# EAGLE board StencilA (EAGLE 5.11)

Size 302.39 x 104.52 mm. Coordinates in mm from the lower left corner, seen from the top.
Outline: 302.39,5.08 302.39,5.33
Outline: 302.39,5.33 302.39,45.97 arc90 297.31,51.05 292.23,51.05 arc180 292.23,0.25 297.31,0.25 arc90 302.39,5.33
Outline: 78.87,0.25 arc-180 78.87,51.05 83.95,51.05 arc-90 89.03,45.97 89.03,5.08 arc-90 83.95,0.25 78.87,0.25
Outline: circle at 25.53,25.65 radius 25.53
Outline: circle at 132.46,25.4 radius 25.4
Outline: circle at 185.34,25.65 radius 25.53
Outline: circle at 238.89,26.16 radius 25.4
Outline: circle at 25.53,78.99 radius 25.53
Outline: circle at 132.46,78.74 radius 25.4
Copper layers (1*16): Top 0.035mm / dielectric 1.5mm / Bottom 0.035mm
Design rules "default": minimum track width 10mil, minimum drill 24mil, track to track 8mil, track to pad 8mil, pad to pad 8mil, via to via 8mil, smd to smd 8mil, copper to edge 40mil, drill to drill 8mil, minimum pad ring 10mil, minimum via ring 8mil, stop-mask expansion 4mil, vias tented up to drill 0mil, thermal gap 10mil

## Footprints (pad centres in the part's own frame; a part is rotated, then mirrored left to right if it is on the bottom)
C0402 = smd 0.7 x 0.9: 1 -0.65,0; 2 0.65,0
C0805 = smd 1.3 x 1.5: 1 -0.95,0; 2 0.95,0
C0603 = smd 1.1 x 1: 1 -0.85,0; 2 0.85,0
EIA6032 = smd 1.5 x 2.4: P$1 -2.3,0; P$2 2.3,0
SOD123FL = smd 0.91 x 1.22: A 1.625,0; C -1.625,0
SOD80C = smd 1.4 x 1.8: A 1.7,0; C -1.7,0
JST-2-SMD = smd 1 x 4.6: 1 -1,-3.7; 2 1,-3.7 | smd 1.6 x 3.4: NC1 -3.4,1.5; NC2 3.4,1.5
1210 = smd 1.2 x 2: 1 -1.6,0; 2 1.6,0
LED-0603 = smd 0.8 x 0.8: A 0,-0.75; C 0,0.75
CRYSTAL-SMD-5X3 = smd 1.9 x 1.1: 1 -1.85,-1.15; 2 1.85,-1.15; 3 1.85,1.15; 4 -1.85,1.15
CM415 = smd 1.1 x 1.9: P$1 0,0; P$2 3.3,0
R0402 = smd 0.7 x 0.9: 1 -0.65,0; 2 0.65,0
0402-RES = smd 0.7 x 0.9: 1 -0.65,0; 2 0.65,0
R1206 = smd 1.6 x 1.803: 1 -1.422,0; 2 1.422,0
SJ_3_PASTE2&3 = smd 0.635 x 1.27: 1 -0.813,0; 2 0,0; 3 0.813,0
SJ_2S-NO = smd 0.635 x 1.27: 1 -0.45,0; 2 0.45,0
QFN20 = smd 1 x 1: 0 0,0 | smd 0.65 x 0.3: 1 -1.9,1; 2 -1.9,0.5; 3 -1.9,0; 4 -1.9,-0.5; 5 -1.9,-1; 11 1.9,-1; 12 1.9,-0.5; 13 1.9,0; 14 1.9,0.5; 15 1.9,1 | smd 0.3 x 0.65: 6 -1,-1.9; 7 -0.5,-1.9; 8 0,-1.9; 9 0.5,-1.9; 10 1,-1.9; 16 1,1.9; 17 0.5,1.9; 18 0,1.9; 19 -0.5,1.9; 20 -1,1.9
ANTENNA-CHIP5 = smd 1.016 x 2.54: FEED -3.302,0; NC 3.302,0
S-PQFP64-G64 = smd 1.2 x 0.3: 1 -5.7,3.75; 2 -5.7,3.25; 3 -5.7,2.75; 4 -5.7,2.25; 5 -5.7,1.75; 6 -5.7,1.25; 7 -5.7,0.75; 8 -5.7,0.25; 9 -5.7,-0.25; 10 -5.7,-0.75; 11 -5.7,-1.25; 12 -5.7,-1.75; 13 -5.7,-2.25; 14 -5.7,-2.75; 15 -5.7,-3.25; 16 -5.7,-3.75; 33 5.7,-3.75; 34 5.7,-3.25; 35 5.7,-2.75; 36 5.7,-2.25; 37 5.7,-1.75; 38 5.7,-1.25; 39 5.7,-0.75; 40 5.7,-0.25; 41 5.7,0.25; 42 5.7,0.75; 43 5.7,1.25; 44 5.7,1.75; 45 5.7,2.25; 46 5.7,2.75; 47 5.7,3.25; 48 5.7,3.75 | smd 0.3 x 1.2: 17 -3.75,-5.7; 18 -3.25,-5.7; 19 -2.75,-5.7; 20 -2.25,-5.7; 21 -1.75,-5.7; 22 -1.25,-5.7; 23 -0.75,-5.7; 24 -0.25,-5.7; 25 0.25,-5.7; 26 0.75,-5.7; 27 1.25,-5.7; 28 1.75,-5.7; 29 2.25,-5.7; 30 2.75,-5.7; 31 3.25,-5.7; 32 3.75,-5.7; 49 3.75,5.7; 50 3.25,5.7; 51 2.75,5.7; 52 2.25,5.7; 53 1.75,5.7; 54 1.25,5.7; 55 0.75,5.7; 56 0.25,5.7; 57 -0.25,5.7; 58 -0.75,5.7; 59 -1.25,5.7; 60 -1.75,5.7; 61 -2.25,5.7; 62 -2.75,5.7; 63 -3.25,5.7; 64 -3.75,5.7
DUBLIB_SOT23 = smd 1 x 1.4: 1 -0.95,-1.1; 2 0.95,-1.1; 3 0,1.1
CCM03-300X = smd 1.5 x 1.3: C1 24.7,5.1; C2 24.7,2.5; C3 24.7,0; C5 0,5.08; C6 0,2.54; C7 0,0; P1 0,-2.54; P2 24.705,-2.54
SOT23-5L = smd 0.55 x 1.2: 1 -0.95,-1.3; 2 0,-1.3; 3 0.95,-1.3; 4 0.95,1.3; 5 -0.95,1.3
QFN-20-5X5 = smd 0.55 x 0.4: P1 0,-0.975; P2 0,-1.625; P3 0,-2.275; P4 0,-2.925; P5 0,-3.575; P11 4.55,-3.575; P12 4.55,-2.925; P13 4.55,-2.275; P14 4.55,-1.625; P15 4.55,-0.975 | smd 0.4 x 0.55: P6 0.975,-4.55; P7 1.625,-4.55; P8 2.275,-4.55; P9 2.925,-4.55; P10 3.575,-4.55; P16 3.575,0; P17 2.925,0; P18 2.275,0; P19 1.625,0; P20 0.975,0
SOIC8@1 = smd 0.5 x 2.2: 1 -1.905,-3.154; 2 -0.645,-3.154; 3 0.625,-3.154; 4 1.895,-3.154; 5 1.905,3.154; 6 0.635,3.154; 7 -0.635,3.154; 8 -1.905,3.154
TSSOP8 = smd 1.2 x 0.35: 1 -2.925,0.975; 2 -2.925,0.325; 3 -2.925,-0.325; 4 -2.925,-0.975; 5 2.925,-0.975; 6 2.925,-0.325; 7 2.925,0.325; 8 2.925,0.975
TSSOP20 = smd 0.305 x 0.991: 1 -2.925,-2.918; 2 -2.275,-2.918; 3 -1.625,-2.918; 4 -0.975,-2.918; 5 -0.325,-2.918; 6 0.325,-2.918; 7 0.975,-2.918; 8 1.625,-2.918; 9 2.275,-2.918; 10 2.925,-2.918; 11 2.925,2.918; 12 2.275,2.918; 13 1.625,2.918; 14 0.975,2.918; 15 0.325,2.918; 16 -0.325,2.918; 17 -0.975,2.918; 18 -1.625,2.918; 19 -2.275,2.918; 20 -2.925,2.918
SO-14 = smd 0.6 x 2.2: 1 -3.81,-2.6; 2 -2.54,-2.6; 3 -1.27,-2.6; 4 0,-2.6; 5 1.27,-2.6; 6 2.54,-2.6; 7 3.81,-2.6; 8 3.81,2.6; 9 2.54,2.6; 10 1.27,2.6; 11 0,2.6; 12 -1.27,2.6; 13 -2.54,2.6; 14 -3.81,2.6
SC70-6L = smd 0.35 x 0.8: 1 -0.65,-0.85; 2 0,-0.85; 3 0.65,-0.85; 4 0.65,0.85; 5 0,0.85; 6 -0.65,0.85
LGA8 = smd 1 x 0.7: P1 -1,3.75; P2 -1,2.5; P3 -1,1.25; P4 -1,0; P5 1,0; P6 1,1.25; P7 1,2.5; P8 1,3.75
STM32-JTAG-10P = smd 0.762 x 2.032: 1 0,0; 2 0,3.81; 3 1.27,0; 4 1.27,3.81; 5 2.54,0; 6 2.54,3.81; 7 3.81,0; 8 3.81,3.81; 9 5.08,0; 10 5.08,3.81
SOT23 = smd 1 x 1.4: 1 -0.95,-1.1; 2 0.95,-1.1; 3 0,1.1
SWITCH-CK-KMT0 = smd 0.7 x 0.7: P1 -1.45,-0.95; P2 1.45,-0.95; P3 1.45,0.95; P4 -1.45,0.95
DFN-2X3 = smd 0.7 x 0.3: 1 -1.325,0.75; 2 -1.325,0.25; 3 -1.325,-0.25; 4 -1.325,-0.75; 5 1.325,-0.75; 6 1.325,-0.25; 7 1.325,0.25; 8 1.325,0.75 | smd 1.5 x 1.3: EXP 0,0
HTSSOP20PWP = smd 0.61 x 2.1: 1 -3.095,-2.45; 10 3.095,-2.45; 11 3.095,2.45; 20 -3.095,2.45 | smd 0.27 x 1.2: 2 -2.275,-2.9; 3 -1.625,-2.9; 4 -0.975,-2.9; 5 -0.325,-2.9; 6 0.325,-2.9; 7 0.975,-2.9; 8 1.625,-2.9; 9 2.275,-2.9; 12 2.275,2.9; 13 1.625,2.9; 14 0.975,2.9; 15 0.325,2.9; 16 -0.325,2.9; 17 -0.975,2.9; 18 -1.625,2.9; 19 -2.275,2.9 | smd 6.8 x 3: EXP 0,0
SOIC8 = smd 0.5 x 2.2: 1 -1.905,-3.154; 2 -0.645,-3.154; 3 0.625,-3.154; 4 1.895,-3.154; 5 1.905,3.154; 6 0.635,3.154; 7 -0.635,3.154; 8 -1.905,3.154
SOT23-6L = smd 0.55 x 1.2: 1 -0.95,-1.3; 2 0,-1.3; 3 0.95,-1.3; 4 0.95,1.3; 5 0,1.3; 6 -0.95,1.3
U.FL = smd 2.2 x 0.85: P$1 0,1.375; P$2 0,-1.375 | smd 1.05 x 1: P$3 1.525,0; P$4 -1.525,0
PW_R-PDSO-G14 = smd 0.4 x 1.2: 1 -1.95,-2.9; 2 -1.3,-2.9; 3 -0.65,-2.9; 4 0,-2.9; 5 0.65,-2.9; 6 1.3,-2.9; 7 1.95,-2.9; 8 1.95,2.9; 9 1.3,2.9; 10 0.65,2.9; 11 0,2.9; 12 -0.65,2.9; 13 -1.3,2.9; 14 -1.95,2.9
TELIT-GE865 = smd 1 x 1: A1 0,0; A2 0,-2.4; A3 0,-4.8; A4 0,-7.2; A5 0,-9.6; A6 0,-12; A7 0,-14.4; A8 0,-16.8; B1 2.4,0; B2 2.4,-2.4; B3 2.4,-4.8; B4 2.4,-7.2; B5 2.4,-9.6; B6 2.4,-12; B7 2.4,-14.4; B8 2.4,-16.8; C1 4.8,0; C2 4.8,-2.4; C3 4.8,-4.8; C4 4.8,-7.2; C5 4.8,-9.6; C6 4.8,-12; C7 4.8,-14.4; C8 4.8,-16.8; D1 7.2,0; D2 7.2,-2.4; D3 7.2,-4.8; D4 7.2,-7.2; D5 7.2,-9.6; D6 7.2,-12; D7 7.2,-14.4; D8 7.2,-16.8; E1 9.6,0; E2 9.6,-2.4; E3 9.6,-4.8; E4 9.6,-7.2; E5 9.6,-9.6; E6 9.6,-12; E7 9.6,-14.4; E8 9.6,-16.8; F1 12,0; F2 12,-2.4; F3 12,-4.8; F4 12,-7.2; F5 12,-9.6; F6 12,-12; F7 12,-14.4; F8 12,-16.8; G1 14.4,0; G2 14.4,-2.4; G3 14.4,-4.8; G4 14.4,-7.2; G5 14.4,-9.6; G6 14.4,-12; G7 14.4,-14.4; G8 14.4,-16.8; H1 16.8,0; H2 16.8,-2.4; H3 16.8,-4.8; H5 16.8,-9.6; H6 16.8,-12; H7 16.8,-14.4; H8 16.8,-16.8
HIH-5030 = smd 2.54 x 2.54: P$1 0,0 | smd 0.508 x 1.778: P$2 -1.27,-11.43; P$3 0,-11.43; P$4 1.27,-11.43
UX60A-MB-5ST = smd 2 x 0.5: 1 2.25,1.6; 2 2.25,0.8; 3 2.25,0; 4 2.25,-0.8; 5 2.25,-1.6 | smd 2.2 x 2.5: M1 -3.3,-4.2; M2 -3.3,4.2; M3 2,4.2; M4 2,-4.2

## Placement (x,y rotation side)
C1  1.5pF  [C0402]  41.4,25.65 180 top
C2  1.0pF  [C0402]  41.4,24.38 180 top
C3  0.0022uF  [C0402]  40.13,23.11 0 top
C4  4.7pF  [C0402]  40.13,21.84 0 top
C5  12.5pF  [C0402]  35.71,16.76 0 top
C6  12.5pF  [C0402]  40.77,19.94 270 top
C7  0.033uF  [C0402]  33.32,29.39 180 top
C8  12.5pF  [C0402]  11,26.47 90 top
C9  12.5pF  [C0402]  11,24.05 270 top
C10  18pF  [C0402]  11.35,32 180 top
C11  18pF  [C0402]  8.79,32 0 top
C12  220pF  [C0402]  14.81,32 0 top
C13  0.1uF  [C0402]  26.54,28.4 0 top
C14  0.1uF  [C0402]  14.81,29.51 180 top
C15  0.1uF  [C0402]  24,15.75 270 top
C16  0.1uF  [C0402]  11.4,19.84 180 top
C17  0.1uF  [C0402]  80.14,42.42 90 top
C18  10uF  [C0805]  22.1,8.56 270 top
C19  0.1uF  [C0402]  82.17,36.32 270 top
C20  10uF  [C0805]  32.84,15.44 90 top
C21  18pF  [C0402]  17.22,42.04 90 top
C22  18pF  [C0402]  17.22,39.7 270 top
C23  0.1uF  [C0402]  28.88,36.32 0 top
C24  0.47uF  [C0402]  30,45.01 0 top
C25  0.1uF  [C0402]  31.42,36.32 180 top
C26  0.1uF  [C0402]  39.83,33.73 180 top
C27  2.2uF  [C0603]  61.59,17.53 270 top
C28  2.2uF  [C0603]  73.28,16.51 270 top
C29  10uf  [C0805]  73.28,12.45 180 top
C30  10uF  [C0805]  73.28,10.41 180 top
C31  33pF  [C0402]  136.27,7.62 270 top
C32  33pF  [C0402]  132.46,14.73 180 top
C33  33pF  [C0402]  133.73,7.62 270 top
C34  33pF  [C0402]  135,7.62 270 top
C35  100uF  [EIA6032]  129.92,17.78 0 top
C36  1uF  [C0402]  129.92,14.73 0 top
C37  0.1uF  [C0402]  250.82,39.37 0 top
C38  0.1uF  [C0402]  230.25,47.75 180 top
C39  0.1uF  [C0402]  233.81,17.27 0 top
C40  0.1uF  [C0402]  233.81,26.16 0 top
C41  0.1uF  [C0402]  233.81,35.05 0 top
C42  0.1uF  [C0402]  235.08,43.94 0 top
C43  0.1uF  [C0402]  250.82,35.31 0 top
C44  10uF  [C0805]  245.24,8.38 270 top
C45  0.1uF  [C0402]  297.05,44.7 0 top
C46  0.1uF  [C0402]  282.07,35.81 270 top
C47  1uF  [C0402]  284.86,26.67 270 top
C48  1uF  [C0402]  286.13,26.67 270 top
C49  33pF  [C0402]  294,14.99 180 top
C50  33pF  [C0402]  294,19.56 180 top
C51  12.5pF  [C0402]  11,79.81 90 top
C52  12.5pF  [C0402]  11,77.39 270 top
C53  18pF  [C0402]  11.35,85.34 180 top
C54  18pF  [C0402]  8.79,85.34 0 top
C55  220pF  [C0402]  14.81,85.34 0 top
C56  0.1uF  [C0402]  26.54,81.74 0 top
C57  0.1uF  [C0402]  14.81,82.85 180 top
C58  0.1uF  [C0402]  24,69.09 270 top
C59  0.1uF  [C0402]  11.4,73.18 180 top
C60  1.5pF  [C0402]  41.4,78.99 180 top
C61  1.0pF  [C0402]  41.4,77.72 180 top
C62  0.0022uF  [C0402]  40.13,76.45 0 top
C63  4.7pF  [C0402]  40.13,75.18 0 top
C64  12.5pF  [C0402]  35.71,70.1 0 top
C65  12.5pF  [C0402]  40.77,73.28 270 top
C66  0.033uF  [C0402]  33.32,82.73 180 top
C67  10uF  [C0805]  22.1,61.9 270 top
C68  10uF  [C0805]  32.84,68.78 90 top
C69  18pF  [C0402]  17.22,95.38 90 top
C70  18pF  [C0402]  17.22,93.04 270 top
C71  0.1uF  [C0402]  28.88,89.66 0 top
C72  0.47uF  [C0402]  30,98.35 0 top
C73  0.1uF  [C0402]  31.42,89.66 180 top
C74  0.1uF  [C0402]  39.83,87.07 180 top
C75  33pF  [C0402]  136.27,60.96 270 top
C76  33pF  [C0402]  132.46,68.07 180 top
C77  33pF  [C0402]  133.73,60.96 270 top
C78  33pF  [C0402]  135,60.96 270 top
C79  100uF  [EIA6032]  129.92,71.12 0 top
C80  1uF  [C0402]  129.92,68.07 0 top
D1  SMF5.0AT1  [SOD123FL]  26.04,8.13 270 top
D2  SMF5.0AT1  [SOD123FL]  24,8.13 270 top
D3  SMF5.0AT1  [SOD123FL]  30.1,8.13 90 top
D4  SMF5.0AT1  [SOD123FL]  28.07,8.13 90 top
D5  3.3V  [SOD80C]  231.27,37.59 270 top
D6  3.3V  [SOD80C]  231.27,28.7 270 top
D7  3.3V  [SOD80C]  231.27,19.81 270 top
D8  3.3V  [SOD80C]  231.27,10.92 270 top
D9  3.3V  [SOD80C]  297.81,18.8 0 top
D10  3.3V  [SOD80C]  297.81,15.75 0 top
D11  SMF5.0AT1  [SOD123FL]  24,61.47 270 top
D12  SMF5.0AT1  [SOD123FL]  30.1,61.47 90 top
D13  SMF5.0AT1  [SOD123FL]  28.07,61.47 90 top
D14  SMF5.0AT1  [SOD123FL]  26.04,61.47 270 top
JP1  [JST-2-SMD]  36.96,61.21 215 top
JP6  [JST-2-SMD]  36.96,7.87 215 top
L1  3.9nH  [C0402]  38.86,25.65 180 top
L2  8.2nH  [C0402]  38.86,24.38 180 top
L3  2.7nH  [C0402]  38.23,22.48 90 top
L4  10uH  [1210]  127.64,11.43 90 top
L5  8.2nH  [C0402]  38.86,77.72 180 top
L6  3.9nH  [C0402]  38.86,78.99 180 top
L7  2.7nH  [C0402]  38.23,75.82 90 top
L8  10uH  [1210]  127.64,64.77 90 top
LED1  ORANGE  [LED-0603]  19.81,9.78 90 top
LED2  YELLOW  [LED-0603]  17.14,11.68 180 top
LED3  RED  [LED-0603]  17.14,9.78 90 top
LED4  BLUE  [LED-0603]  28.93,25.2 315 top
LED5  GREEN  [LED-0603]  28.12,26.01 315 top
LED6  RED  [LED-0603]  137.03,43.69 270 bottom
LED7  GREEN  [LED-0603]  137.03,44.96 270 bottom
LED8  ORANGE  [LED-0603]  19.81,63.12 90 top
LED9  YELLOW  [LED-0603]  17.14,65.02 180 top
LED10  RED  [LED-0603]  17.14,63.12 90 top
LED11  BLUE  [LED-0603]  28.93,78.54 315 top
LED12  GREEN  [LED-0603]  28.12,79.35 315 top
LED13  RED  [LED-0603]  137.03,97.03 270 bottom
LED14  GREEN  [LED-0603]  137.03,98.3 270 bottom
Q1  12MHz  [CRYSTAL-SMD-5X3]  8.38,25.2 270 top
Q2  CM415  [CM415]  8.36,30.28 0 top
Q3  16MHz  [CRYSTAL-SMD-5X3]  36.96,19.3 0 top
Q4  12MHz  [CRYSTAL-SMD-5X3]  19.68,40.97 270 top
Q5  CM415  [CM415]  8.36,83.62 0 top
Q6  12MHz  [CRYSTAL-SMD-5X3]  8.38,78.54 270 top
Q7  16MHz  [CRYSTAL-SMD-5X3]  36.96,72.64 0 top
Q8  12MHz  [CRYSTAL-SMD-5X3]  19.68,94.31 270 top
R1  47K  [R0402]  31.37,38.86 0 top
R2  22K  [R0402]  37.49,29.39 180 top
R3  100K  [R0402]  14.81,30.76 0 top
R4  470  [R0402]  19.94,8.64 0 top
R5  470  [R0402]  30.64,28.04 135 top
R6  47K  [R0402]  28.83,38.86 180 top
R7  47K  [R0402]  61.59,20.57 270 top
R8  470  [R0402]  29.05,27.84 135 top
R9  470  [R0402]  19.05,11.05 180 top
R10  2K  [R0402]  21.46,11.68 180 top
R11  10K  [R0402]  31.37,37.59 0 top
R12  470  [R0402]  28.83,37.59 0 top
R13  10K  [R0402]  73.79,8.38 0 top
R14  10K  [R0402]  73.79,7.11 0 top
R15  10K  [R0402]  143.89,13.97 180 top
R16  100K  [R0402]  39.83,31.37 180 top
R17  47K  [R0402]  39.83,32.56 0 top
R18  47K  [R0402]  18.01,31.72 270 top
R19  47K  [R0402]  143.89,12.7 180 top
R20  10K  [R0402]  21.46,13.59 0 top
R21  10K  [R0402]  19.06,13.6 180 top
R22  470  [R0402]  19.05,12.32 180 top
R23  10K  [R0402]  141.35,12.7 180 top
R24  47K  [R0402]  141.35,13.97 180 top
R25  470  [R0402]  133.22,43.69 0 top
R26  470  [R0402]  133.22,44.96 0 top
R27  47K  [R0402]  151.51,29.21 90 top
R28  47K  [R0402]  151.51,26.67 270 top
R29  10K  [0402-RES]  181.74,28.19 0 top
R30  10K  [0402-RES]  176.66,28.19 0 top
R31  10K  [0402-RES]  194.44,28.19 0 top
R32  10K  [0402-RES]  189.36,28.19 0 top
R33  10K  [0402-RES]  179.2,23.11 0 top
R34  10K  [0402-RES]  179.2,15.49 0 top
R35  10K  [0402-RES]  191.9,23.11 0 top
R36  10K  [0402-RES]  191.9,15.49 180 top
R37  47K  [R0402]  237.62,36.32 0 top
R38  47K  [R0402]  237.62,27.43 0 top
R39  47K  [R0402]  237.62,18.54 0 top
R40  47K  [R0402]  237.62,9.65 0 top
R41  1M  [R0402]  235.08,42.67 180 top
R42  1M  [R0402]  233.81,33.78 180 top
R43  1M  [R0402]  233.81,24.89 180 top
R44  1M  [R0402]  233.81,16 180 top
R45  125  [R1206]  249.05,23.62 180 top
R46  125  [R1206]  246.51,21.08 180 top
R47  125  [R1206]  243.97,18.54 180 top
R48  [R1206]  241.43,16 180 top
R49  1M  [R0402]  235.08,41.4 180 top
R50  1M  [R0402]  235.08,32.51 180 top
R51  1M  [R0402]  235.08,23.62 180 top
R52  1M  [R0402]  235.08,14.73 180 top
R53  47K  [R0402]  233.81,36.32 0 top
R54  47K  [R0402]  233.81,27.43 0 top
R55  47K  [R0402]  233.81,18.54 0 top
R56  47K  [R0402]  233.81,9.65 0 top
R57  47K  [R0402]  243.71,7.37 90 top
R58  47K  [R0402]  288.42,26.67 270 top
R59  47K  [R0402]  288.42,34.8 90 top
R60  100K  [R0402]  14.81,84.1 0 top
R61  47K  [R0402]  18.01,85.06 270 top
R62  22K  [R0402]  37.49,82.73 180 top
R63  2K  [R0402]  21.46,65.02 180 top
R64  10K  [R0402]  31.37,90.93 0 top
R65  470  [R0402]  28.83,90.93 0 top
R66  100K  [R0402]  39.83,84.71 180 top
R67  470  [R0402]  19.94,61.98 0 top
R68  470  [R0402]  30.64,81.38 135 top
R69  470  [R0402]  29.05,81.18 135 top
R70  470  [R0402]  19.05,64.39 180 top
R71  10K  [R0402]  21.46,66.93 0 top
R72  10K  [R0402]  19.06,66.94 180 top
R73  470  [R0402]  19.05,65.66 180 top
R74  47K  [R0402]  39.83,85.9 0 top
R75  47K  [R0402]  31.37,92.2 0 top
R76  47K  [R0402]  28.83,92.2 180 top
R77  10K  [R0402]  143.89,67.31 180 top
R78  47K  [R0402]  143.89,66.04 180 top
R79  10K  [R0402]  141.35,66.04 180 top
R80  47K  [R0402]  141.35,67.31 180 top
R81  470  [R0402]  133.22,97.03 0 top
R82  470  [R0402]  133.22,98.3 0 top
R83  47K  [R0402]  151.51,82.55 90 top
R84  47K  [R0402]  151.51,80.01 270 top
SJ1  [SJ_3_PASTE2&3]  185.55,11.48 0 top
SJ2  SOLDERJUMPERNO  [SJ_2S-NO]  228.73,5.84 180 bottom
U1  NRF24L01SMD  [QFN20]  35.05,25.65 0 top
U2  ANTENNA2SMD5  [ANTENNA-CHIP5]  46.48,25.65 0 top
U3  STM32F100R4T6B  [S-PQFP64-G64]  20.19,23.62 0 top
U4  BIPOLAR-PMBT6428  [DUBLIB_SOT23]  141.35,16.51 270 top
U5  CCM03-3009  [CCM03-300X]  133.73,16.51 90 bottom
U6  NCP500  [SOT23-5L]  131.19,7.11 180 top
U7  MICROCHIP-USB-MCP2200  [QFN-20-5X5]  23.24,40.06 90 top
U8  NCP500  [SOT23-5L]  30.23,15.49 0 top
U9  SST25VF080B  [SOIC8@1]  33.5,32.94 270 top
U10  EEPROM-ATMEL-AT24HC02B  [TSSOP8]  228.73,45.51 0 top
U11  DIGIPOT-MCP44X1  [TSSOP20]  245.49,38.61 270 top
U12  OPAMP-ST-LMV324ID  [SO-14]  248.54,30.23 180 top
U13  MULTIPLEXER-TI-TS5A4624  [SC70-6L]  237.62,38.86 0 top
U14  MULTIPLEXER-TI-TS5A4624  [SC70-6L]  237.62,29.97 0 top
U15  MULTIPLEXER-TI-TS5A4624  [SC70-6L]  237.62,21.08 0 top
U16  MULTIPLEXER-TI-TS5A4624  [SC70-6L]  237.62,12.19 0 top
U17  MULTIPLEXER-TI-TS5A4624  [SC70-6L]  233.81,38.86 0 top
U18  MULTIPLEXER-TI-TS5A4624  [SC70-6L]  233.81,29.97 0 top
U19  MULTIPLEXER-TI-TS5A4624  [SC70-6L]  233.81,21.08 0 top
U20  MULTIPLEXER-TI-TS5A4624  [SC70-6L]  233.81,12.19 0 top
U21  NCP500  [SOT23-5L]  241.43,8.38 0 top
U22  REGULATOR-TI-LM317LCPW  [TSSOP8]  254.13,19.81 135 top
U23  REGULATOR-TI-LM317LCPW  [TSSOP8]  251.59,17.27 135 top
U24  REGULATOR-TI-LM317LCPW  [TSSOP8]  249.05,14.73 135 top
U25  REGULATOR-TI-LM317LCPW  [TSSOP8]  246.51,12.19 135 top
U26  EEPROM-ATMEL-AT24HC02B  [TSSOP8]  291.72,43.73 0 top
U27  PRESSURE-FREESCALE-MPL115A1  [LGA8]  288.42,30.73 90 top
U28  STM32F100R4T6B  [S-PQFP64-G64]  20.19,76.96 0 top
U29  NRF24L01SMD  [QFN20]  35.05,78.99 0 top
U30  ANTENNA2SMD5  [ANTENNA-CHIP5]  46.48,78.99 0 top
U31  NCP500  [SOT23-5L]  30.23,68.83 0 top
U32  MICROCHIP-USB-MCP2200  [QFN-20-5X5]  23.24,93.4 90 top
U33  SST25VF080B  [SOIC8@1]  33.5,86.28 270 top
U34  BIPOLAR-PMBT6428  [DUBLIB_SOT23]  141.35,69.85 270 top
U35  CCM03-3009  [CCM03-300X]  133.73,69.85 90 bottom
U36  NCP500  [SOT23-5L]  131.19,60.45 180 top
U$1  STM32-JTAG-10P  [STM32-JTAG-10P]  21.44,32.46 0 top
U$2  STM32-JTAG-10P  [STM32-JTAG-10P]  21.44,85.8 0 top
U$3  MICROCHIP-TEMP-TC1047  [SOT23]  26.92,15.11 180 top
U$4  SWITCH-CK-KMT0  [SWITCH-CK-KMT0]  10.79,34.29 180 top
U$5  CHARGE-MCP7383X  [DFN-2X3]  24.89,11.43 180 top
U$6  DIGIPOT-MCP44X1  [TSSOP20]  75.56,41.66 270 top
U$7  OPAMP-ST-LMV321RILT  [SOT23-5L]  83.69,42.67 90 top
U$8  REGULATOR-TI-60131  [HTSSOP20PWP]  67.44,17.78 270 top
U$9  TRANSISTOR-VISHAY-SI7288DP  [SOIC8]  79.12,11.94 0 top
U$10  EEPROM-ATMEL-AT24HC02B  [TSSOP8]  75.56,36.11 0 top
U$11  BIPOLAR-PMBT6428  [DUBLIB_SOT23]  141.35,10.16 270 top
U$12  ESDAXXSC6  [SOT23-6L]  137.54,11.43 0 top
U$13  DALC208  [SOT23-6L]  133.73,11.43 0 top
U$14  U.FL  [U.FL]  118.49,35.56 0 top
U$15  INTERFACE-TXS0104E  [PW_R-PDSO-G14]  147.7,30.99 180 top
U$16  INTERFACE-TXS0104E  [PW_R-PDSO-G14]  147.7,20.32 0 top
U$17  TELIT-GE865T  [TELIT-GE865]  141.35,22.86 180 top
U$18  TRANSISTOR-VISHAY-SI7288DP  [SOIC8]  179.2,32 270 top
U$19  TRANSISTOR-VISHAY-SI7288DP  [SOIC8]  191.9,32 270 top
U$20  TRANSISTOR-VISHAY-SI7288DP  [SOIC8]  179.2,19.3 270 top
U$21  TRANSISTOR-VISHAY-SI7288DP  [SOIC8]  191.9,19.3 270 top
U$22  HIH-5030  [HIH-5030]  295.78,37.85 270 top
U$23  ESDAXXSC6  [SOT23-6L]  293.24,17.27 90 top
U$24  MICROCHIP-TEMP-TC1047  [SOT23]  26.92,68.45 180 top
U$25  SWITCH-CK-KMT0  [SWITCH-CK-KMT0]  10.79,87.63 180 top
U$26  CHARGE-MCP7383X  [DFN-2X3]  24.89,64.77 180 top
U$27  BIPOLAR-PMBT6428  [DUBLIB_SOT23]  141.35,63.5 270 top
U$28  ESDAXXSC6  [SOT23-6L]  137.54,64.77 0 top
U$29  DALC208  [SOT23-6L]  133.73,64.77 0 top
U$30  U.FL  [U.FL]  118.49,88.9 0 top
U$31  INTERFACE-TXS0104E  [PW_R-PDSO-G14]  147.7,84.33 180 top
U$32  INTERFACE-TXS0104E  [PW_R-PDSO-G14]  147.7,73.66 0 top
U$33  TELIT-GE865T  [TELIT-GE865]  141.35,76.2 180 top
X1  MINI-USB-UX60A-MB-5ST  [UX60A-MB-5ST]  36.32,40.89 235 top
X2  MINI-USB-UX60A-MB-5ST  [UX60A-MB-5ST]  36.32,94.23 235 top

## Library data of the parts
C1-C34 C36-C78 C80 R1-R28 R37-R84 = rcl
C35 C79 JP1 JP6 L1-L3 L5-L7 LED1-LED14 Q1 Q3 Q4 Q6-Q8 R29-R36 SJ1 U1 U2 U29 U30 U$14 U$30 = SparkFun
D1-D14 = diode
L4 L8 SJ2 U4-U6 U10-U27 U34-U36 U$1 U$2 U$4-U$13 U$15-U$23 U$25-U$29 U$31-U$33 = Pygmy
Q2 Q5 U3 U7-U9 U28 U31-U33 U$3 U$24 X1 X2 = dublib

## Nets
5V2: SJ1.1
A0: U3.14
A1: U3.15
A2: U3.8
A3: U3.9
A4: U3.10
A5: U3.11
A6: U3.24
A7: U3.25
A8: U28.14
A9: U28.15
A10: U28.8
A11: U28.9
A12: U28.10
A13: U28.11
A14: U28.24
A15: U28.25
ADC1: U$17.F5
ADC2: U$17.F6
ADC3: U$33.F5
ADC4: U$33.F6
BAT6: U21.1
D0: U3.57
D1: U3.37
D2: U3.38
D3: U3.39
D4: U28.57
D5: U28.37
D6: U28.38
D7: U28.39
DAC: U$17.G7
DAC1: U3.20
DAC2: U3.21
DAC3: U28.20
DAC4: U28.21
DAC5: U$33.G7
EAR+: U$17.D8
EAR+1: U$33.D8
EAR-: U$17.E8
EAR-1: U$33.E8
GND3: SJ1.3
GPIO_01: U$17.D3
GPIO_02: U$17.D2
GPIO_03: U$17.E4
GPIO_04: U$17.H7
GPIO_05: U$17.G2
GPIO_06: U$17.H8
GPIO_07: U$17.G6
GPIO_08: U$17.D4
GPIO_09: U$17.F4
GPIO_10: U$17.E3
GPIO_11: U$33.D3
GPIO_12: U$33.D2
GPIO_13: U$33.E4
GPIO_14: U$33.H7
GPIO_15: U$33.G2
GPIO_16: U$33.G6
GPIO_17: U$33.D4
GPIO_18: U$33.F4
GPIO_19: U$33.E3
GPIO_20: U$33.H8
GSM_CTS: U$16.12
GSM_CTS1: U$32.12
GSM_LED1: LED6.A
GSM_LED2: LED7.A
GSM_LED3: LED13.A
GSM_LED4: LED14.A
GSM_ONOFF: R15.1
GSM_ONOFF1: R77.1
GSM_PWRMON: U$15.3
GSM_PWRMON1: U$31.3
GSM_RST: R23.1
GSM_RST1: R79.1
GSM_RTS: U$16.13
GSM_RTS1: U$32.13
GSM_RX: U$16.10
GSM_RX1: U$32.10
GSM_SERVICE: U$15.4
GSM_SERVICE1: U$31.4
GSM_STAT: U$15.2
GSM_STAT1: U$31.2
GSM_TX: U$16.11
GSM_TX1: U$32.11
MCO: U3.41
MCO1: U28.41
MIC+: U$17.B8
MIC+1: U$33.B8
MIC-: U$17.C8
MIC-1: U$33.C8
MISO: U27.P6
MOSI: U27.P7
N$1: D12.C
N$2: D13.C
N$3: D11.A
N$16: D3.C
N$29: D4.C
N$38: D2.A
RESET: U$6.15
RESET1: U11.15
RING: U$17.B4
RING1: U$33.B4
RX1: U3.43
RX2: U3.17
RX3: U28.43
RX4: U28.17
RX_AUX: U$17.E1
RX_AUX1: U$33.E1
SCK: U27.P8
SCL2: U26.6
SDA2: U26.5
SENSOR1: U$22.P$3
T0: U3.58
T1: U3.59
T2: U3.61
T3: U3.62
T4: U28.58
T5: U28.59
T6: U28.61
T7: U28.62
TA0: U3.22
TA1: U3.23
TA2: U28.22
TA3: U28.23
TX1: U3.42
TX2: U3.16
TX3: U28.42
TX4: U28.16
TX_AUX: U$17.D1
TX_AUX1: U$33.D1
VRTC: U$17.H2
VRTC1: U$33.H2

## Text on the board
Document: Nebula | Gas Sensor Shield | GSM Shield | Power Control Shield | Volt Shield | Humidity Shield
HeatSink: U4